# EAGLE board proyecto (EAGLE 9.6.2)
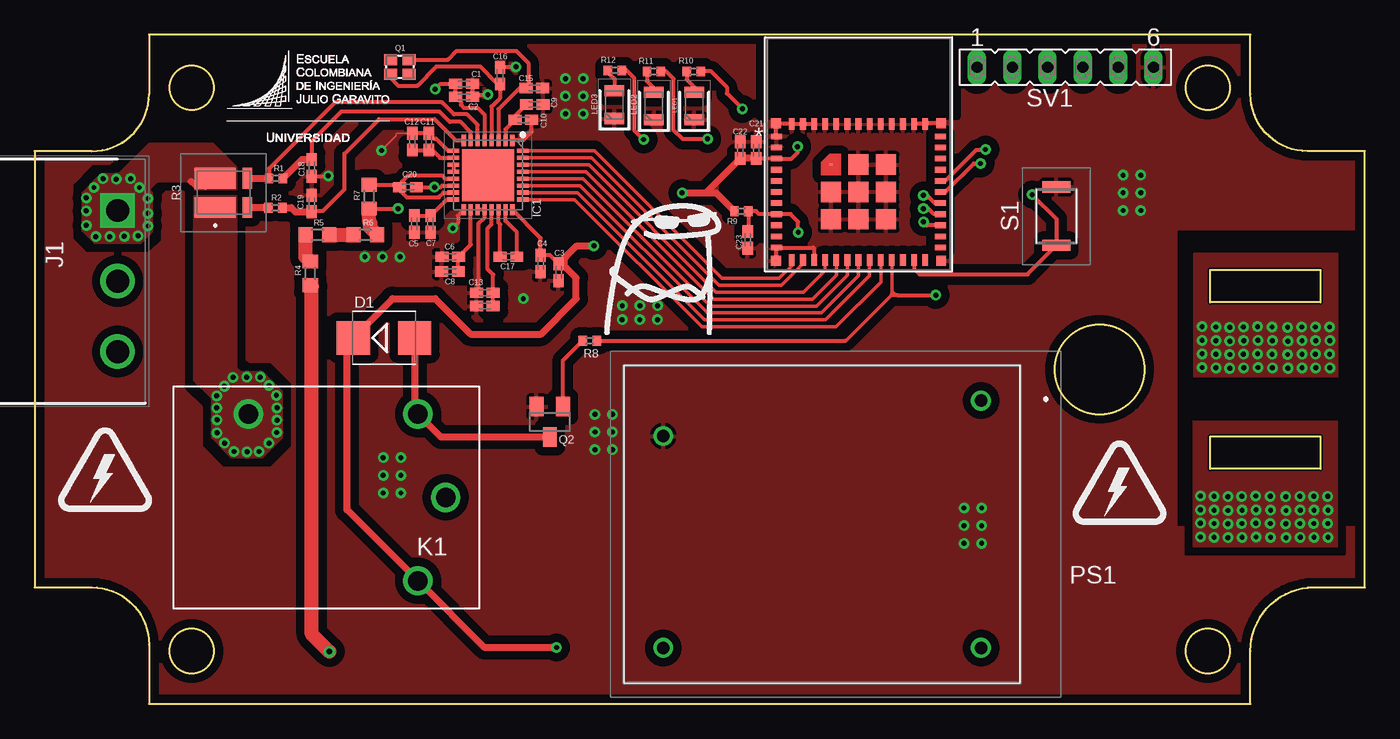
[diagram p0: board, top side]
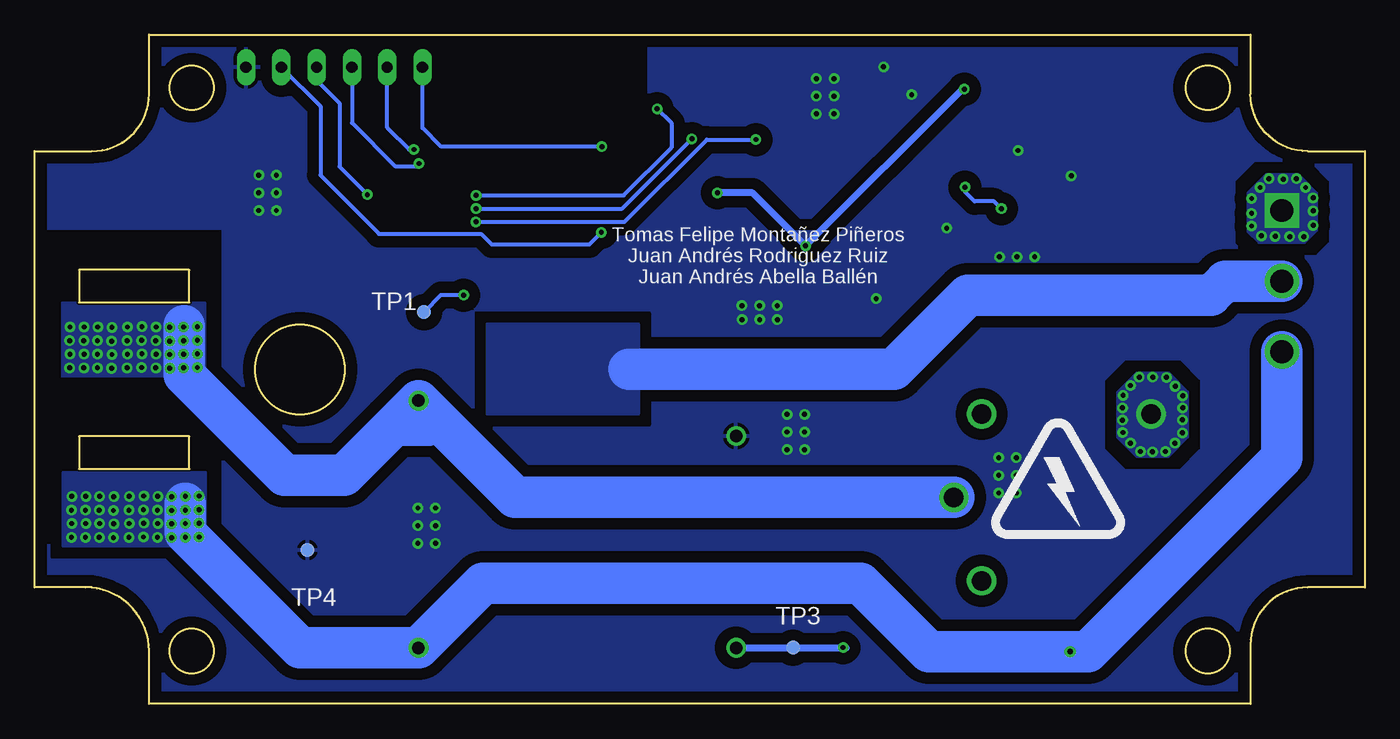
[diagram p1: board, bottom side, seen from below]

Size 95.76 x 48.16 mm. Coordinates in mm from the lower left corner, seen from the top.
Outline: 91.64,8.38 92.1,8.38
Outline: 92.1,8.38 95.76,8.38 95.76,39.78 91.64,39.78 arc-90 87.53,43.89 87.53,48.16 8.23,48.16 8.23,43.89 arc-90 4.11,39.78 0,39.78 0,8.38 4.11,8.38 arc-90 8.23,4.27 8.23,0 87.53,0 87.53,3.81 arc-90 92.1,8.38
Outline: 92.56,31.24 92.56,28.91 84.63,28.91 84.63,31.24 92.56,31.24
Outline: 84.63,16.92 84.63,19.25 92.56,19.25 92.56,16.92 84.63,16.92
Outline: circle at 11.3,44.35 radius 1.59
Outline: circle at 11.3,3.81 radius 1.59
Outline: circle at 84.45,3.81 radius 1.59
Outline: circle at 84.45,44.35 radius 1.59
Outline: circle at 76.66,24.08 radius 3.21
Copper layers (1*16): Top 0.035mm / dielectric 1.5mm / Bottom 0.035mm
Design rules "default *": minimum track width 4mil, minimum drill 0.35mm, track to track 0.1mm, track to pad 0.2mm, pad to pad 0.2mm, via to via 0.2mm, smd to smd 0mil, copper to edge 4mil, drill to drill 4mil, minimum pad ring 10mil, minimum via ring 8mil, stop-mask expansion 2mil, vias tented up to drill 20mil, thermal gap 10mil
tRestrict: area 52.5,42.4 to 66.1,48.1
bRestrict: area 52.5,42.4 to 66.1,48.1

## Footprints (pad centres in the part's own frame; a part is rotated, then mirrored left to right if it is on the bottom)
C0402K = smd 0.925 x 0.74: 1 -0.6,0; 2 0.6,0
SMB = smd 2.4 x 2.4: A 2.2,0; C -2.2,0
QFN50P500X500X80-33N = smd 0.8 x 0.3: 1 -2.5,1.75; 2 -2.5,1.25; 3 -2.5,0.75; 4 -2.5,0.25; 5 -2.5,-0.25; 6 -2.5,-0.75; 7 -2.5,-1.25; 8 -2.5,-1.75; 17 2.5,-1.75; 18 2.5,-1.25; 19 2.5,-0.75; 20 2.5,-0.25; 21 2.5,0.25; 22 2.5,0.75; 23 2.5,1.25; 24 2.5,1.75 | smd 0.3 x 0.8: 9 -1.75,-2.5; 10 -1.25,-2.5; 11 -0.75,-2.5; 12 -0.25,-2.5; 13 0.25,-2.5; 14 0.75,-2.5; 15 1.25,-2.5; 16 1.75,-2.5; 25 1.75,2.5; 26 1.25,2.5; 27 0.75,2.5; 28 0.25,2.5; 29 -0.25,2.5; 30 -0.75,2.5; 31 -1.25,2.5; 32 -1.75,2.5 | smd 3.75 x 3.75: 33 0,0
SHDRRA3W102P0X508_1X3_1706X120 = drill 1.65 pad 2.475 square: 1 0,0 | drill 1.65 pad 2.475: 2 -5.08,0; 3 -10.16,0
RELAY_PR28-3V-360-1A-E = drill 1.4: COIL1 -6.1,6; COIL2 -6.1,-6; COM -8.1,0; NO 6.1,-6
LEDC2012X120N = smd 0.8 x 1.4: 1 -1,0; 2 1,0
RAC0305SK = drill 0.9 pad 1.4: 1 0,0; 2 22.86,2.54; 3 22.86,17.78; 4 0,17.78
2.0X1.6_KX-5 = smd 0.95 x 0.8: 1 -0.675,-0.525; 2 0.675,-0.525; 3 0.675,0.525; 4 -0.675,0.525
SOT23 = smd 1 x 1.4: 1 -0.95,-1.1; 2 0.95,-1.1; 3 0,1.1
R0402 = smd 0.6 x 0.7: 1 -0.5,0; 2 0.5,0
WSK12161L000FEB = smd 1.495 x 2.95: 1 -1.053,0.6; 4 1.053,0.6 | smd 1.5 x 0.7: 2 -1.053,-1.725; 3 1.053,-1.725
R0603 = smd 1 x 1.1: 1 -0.85,0; 2 0.85,0
SKRKAEE020 = smd 0.8 x 2: 1 -2.1,0; 2 2.1,0
FE06 = drill 0.813 long: 1 -6.35,0; 2 -3.81,0; 3 -1.27,0; 4 1.27,0; 5 3.81,0; 6 6.35,0
TP10R = smd 1 x 1: TP 0,0
ESP32-PICO-MINI-02_EXP = smd 0.813 x 0.406: 1 -5.9,1.295; 2 -5.9,0.495; 3 -5.9,-0.305; 4 -5.9,-1.105; 5 -5.9,-1.905; 6 -5.9,-2.705; 7 -5.9,-3.505; 8 -5.9,-4.305; 9 -5.9,-5.105; 10 -5.9,-5.905; 11 -5.9,-6.705; 25 5.9,-6.705; 26 5.9,-5.905; 27 5.9,-5.105; 28 5.9,-4.305; 29 5.9,-3.505; 30 5.9,-2.705; 31 5.9,-1.905; 32 5.9,-1.105; 33 5.9,-0.305; 34 5.9,0.495; 35 5.9,1.295 | smd 0.406 x 0.813: 12 -4.8,-7.605; 13 -4,-7.605; 14 -3.2,-7.605; 15 -2.4,-7.605; 16 -1.6,-7.605; 17 -0.8,-7.605; 18 0,-7.605; 19 0.8,-7.605; 20 1.6,-7.605; 21 2.4,-7.605; 22 3.2,-7.605; 23 4,-7.605; 24 4.8,-7.605; 36 4.8,2.195; 37 4,2.195; 38 3.2,2.195; 39 2.4,2.195; 40 1.6,2.195; 41 0.8,2.195; 42 0,2.195; 43 -0.8,2.195; 44 -1.6,2.195; 45 -2.4,2.195; 46 -3.2,2.195; 47 -4,2.195; 48 -4.8,2.195 | smd 1.448 x 1.448: 49 0,-2.705; 55 0,-0.73; 56 1.975,-0.73; 57 1.975,-2.705; 58 1.975,-4.68; 59 0,-4.68; 60 -1.975,-4.68; 61 -1.975,-2.705 | smd 0.711 x 0.711: 50 5.95,2.245; 51 5.95,-7.655; 52 -5.95,-7.655; 53 -5.95,2.245 | smd 0.127 x 0.127: 54 -1.975,-0.73

## Placement (x,y rotation side)
C1  0.1u  [C0402K]  30.91,44.63 0 top
C2  4.7u  [C0402K]  30.91,43.69 0 top
C3  0.1u  [C0402K]  37.72,31.06 270 top
C4  4.7u  [C0402K]  36.42,31.7 270 top
C5  4.7u  [C0402K]  27.33,34.54 270 top
C6  4.7u  [C0402K]  29.92,32.18 0 top
C7  0.1u  [C0402K]  28.5,34.54 270 top
C8  0.1u  [C0402K]  29.9,31.12 0 top
C9  0.1u  [C0402K]  35.99,43.13 0 top
C10  4.7u  [C0402K]  35.18,42.04 0 top
C11  0.1u  [C0402K]  28.37,40.46 90 top
C12  4.7u  [C0402K]  27.18,40.46 90 top
C13  0.1u  [C0402K]  32.41,29.59 180 top
C14  4.7u  [C0402K]  32.41,28.63 180 top
C15  22p  [C0402K]  35.97,44.32 0 top
C16  22p  [C0402K]  33.5,45.21 270 top
C17  0.47u  [C0402K]  34.11,32.18 180 top
C18  0.1u  [C0402K]  19.94,38.58 270 top
C19  0.1u  [C0402K]  19.94,36.02 270 top
C20  0.15u  [C0402K]  26.87,37.19 0 top
C21  22u  [C0402K]  51.94,39.85 90 top
C22  0.1u  [C0402K]  50.8,39.85 90 top
C23  0.1u  [C0402K]  51.33,33.4 270 top
D1  [SMB]  25.15,26.34 0 top
IC1  ADE9153AACPZ  [QFN50P500X500X80-33N]  32.64,38.05 270 top
J1  796638-3  [SHDRRA3W102P0X508_1X3_1706X120]  5.97,35.51 90 top
K1  PR28-3V-360-1A-E  [RELAY_PR28-3V-360-1A-E]  21.49,14.86 180 top
LED1  NCD0805R1  [LEDC2012X120N]  47.47,43.03 90 top
LED2  NCD0805B2  [LEDC2012X120N]  44.58,43.03 90 top
LED3  NCD0805G1  [LEDC2012X120N]  41.73,43.13 90 top
PS1  RAC03-3.3SK  [RAC0305SK]  68.12,21.82 180 top
Q1  12.288M  [2.0X1.6_KX-5]  26.29,45.85 0 top
Q2  BSS123  [SOT23]  37.08,20.29 180 top
R1  150  [R0402]  17.37,37.82 0 top
R2  150  [R0402]  17.32,35.71 0 top
R3  WSK12161L000FEB  [WSK12161L000FEB]  13.59,36.78 90 top
R4  330k  [R0603]  19.84,30.99 90 top
R5  330k  [R0603]  20.35,33.76 0 top
R6  330k  [R0603]  23.8,33.76 0 top
R7  1k  [R0603]  24.08,36.5 90 top
R8  10K  [R0402]  39.95,26.14 180 top
R9  10K  [R0402]  50.88,35.46 0 top
R10  1k  [R0402]  47.45,45.52 180 top
R11  1k  [R0402]  44.58,45.52 180 top
R12  1k  [R0402]  41.76,45.59 180 top
S1  SKRKAEE020  [SKRKAEE020]  73.56,35.1 90 top
SV1  [FE06]  74.19,45.82 0 top
TP1  PTR1TP10R  [TP10R]  67.74,28.19 0 bottom
TP3  PTR1TP10R  [TP10R]  41.17,4.05 0 bottom
TP4  PTR1TP10R  [TP10R]  76.12,11.07 0 bottom
U1  ESP32-PICO-MINI-02-N8R2ESP32-PICO-MINI-02_EXP  [ESP32-PICO-MINI-02_EXP]  59.31,39.55 0 top

## Library data of the parts
C1-C23 = rcl; SPICEPREFIX: C
D1 = diode
IC1 = SamacSys_Parts; DESCRIPTION: Data Acquisition ADCs/DACs - Specialized 1 PH Mtr IC w/ Auto Calibration; HEIGHT: 0.8mm; MANUFACTURER_NAME: Analog Devices; MANUFACTURER_PART_NUMBER: ADE9153AACPZ; MOUSER_PART_NUMBER: 584-ADE9153AACPZ; MOUSER_PRICE-STOCK: https://www.mouser.co.uk/ProductDetail/Analog-Devices/ADE9153AACPZ?qs=rrS6PyfT74fO4%2FDiqnqz3A%3D%3D
J1 = SamacSys_Parts; DESCRIPTION: Body Features: Primary Product Color Green | Product Orientation Right Angle | Configuration Features: Stacking Configuration Side Stackable | Number of Positions 3 | Number of Rows 1 | Contact Features: Contact Base Material Phosphor Bronze | Contact Current Rating (Max) 15 AMP | Contact Mating Area Plating Material Tin | Dimensions: Wire Size .05 3 MMSQ | Wire Size 30 12 AWG | Electrical Characteristics: Operating Voltage 300 VAC | Housing Features: Housing Material PA 66 | Centerline (Pitch) .2 I; HEIGHT: 8.5mm; MANUFACTURER_NAME: TE Connectivity; MANUFACTURER_PART_NUMBER: 796638-3; MOUSER_PART_NUMBER: 571-7966383; MOUSER_PRICE-STOCK: https://www.mouser.co.uk/ProductDetail/TE-Connectivity/796638-3?qs=OgP1KchuM4OaLB9LUcSrBQ%3D%3D
K1 = PR28-3V-360-1A-E; AVAILABILITY: In Stock; CHECK_PRICES: https://www.snapeda.com/parts/PR28-3V-360-1A-E/Same+Sky/view-part/?ref=eda; CUI_PURCHASE_URL: https://www.cuidevices.com/product/relays/power-relays/pr28-3v-360-1a-e?utm_source=snapeda.com&utm_medium=referral&utm_campaign=snapedaBOM; DESCRIPTION: 22 x 16 x 16.6 mm, 3 V, 16 A, SPST (1 Form A), Epoxy Sealed, Class F, Power Relay; MF: CUI Devices; MP: PR28-3V-360-1A-E; PACKAGE: None; PRICE: None; PURCHASE-URL: https://www.snapeda.com/api/url_track_click_mouser/?unipart_id=15935205&manufacturer=CUI Devices&part_name=PR28-3V-360-1A-E&search_term=None; SNAPEDA_LINK: https://www.snapeda.com/parts/PR28-3V-360-1A-E/Same+Sky/view-part/?ref=snap
LED1 = SamacSys_Parts; DESCRIPTION: LED Chip Light Emitting Diode; HEIGHT: 1.2mm; MANUFACTURER_NAME: Foshan NationStar Optoelectronics; MANUFACTURER_PART_NUMBER: NCD0805R1
LED2 LED3 = libreria_propia
PS1 = SamacSys_Parts; DESCRIPTION: AC/DC Power Modules 3W 85-264Vin 3.3Vout 900mA; HEIGHT: 18.4mm; MANUFACTURER_NAME: RECOM Power; MANUFACTURER_PART_NUMBER: RAC03-3.3SK; MOUSER_PART_NUMBER: 919-RAC03-3.3SK; MOUSER_PRICE-STOCK: https://www.mouser.co.uk/ProductDetail/RECOM-Power/RAC03-3.3SK?qs=EBDBlbfErPyS11fagCV%252BCw%3D%3D
Q1 = crystal-geyer_V1_0
Q2 = transistor-small-signal
R1 R2 R4-R12 = rcl; SPICEPREFIX: R
R3 = SamacSys_Parts; DESCRIPTION: Current Sense Resistors - SMD .001 OHM 1% 3W 50PPM; HEIGHT: 1.9mm; MANUFACTURER_NAME: Vishay; MANUFACTURER_PART_NUMBER: WSK12161L000FEB; MOUSER_PART_NUMBER: 71-WSK12161L000FEB; MOUSER_PRICE-STOCK: https://www.mouser.co.uk/ProductDetail/Vishay-Dale/WSK12161L000FEB?qs=jj7GbYRQuOZg3vJxu0nEzw%3D%3D
S1 = SamacSys_Parts; DESCRIPTION: Tactile Switches 3.9x2.9x2.0mm 160gf Packaging Temp 80oC; HEIGHT: 2mm; MANUFACTURER_NAME: ALPS Electric; MANUFACTURER_PART_NUMBER: SKRKAEE020; MOUSER_PART_NUMBER: 688-SKRKAEE020; MOUSER_PRICE-STOCK: https://www.mouser.co.uk/ProductDetail/Alps-Alpine/SKRKAEE020?qs=MrosSN5%252BUQW89XjXIp8Ugw%3D%3D
SV1 = con-lsta; OC_FARNELL: unknown; OC_NEWARK: unknown
TP1 TP3 TP4 = testpad
U1 = 2024-09-07_16-09-34_Library; COPYRIGHT: Copyright (C) 2024 Ultra Librarian. All rights reserved.; MANUFACTURER_PART_NUMBER: ESP32-PICO-MINI-02-N8R2; MFR_NAME: Espressif Systems

## Nets
+3V3: C1.1 C2.1 C3.1 C4.1 C21.1 C22.1 D1.C IC1.5 IC1.24 K1.COIL1 PS1.3 R9.1 SV1.1 TP3.TP U1.3
AVDDOUT: C5.1 C7.1 IC1.16
BOOT: S1.1 SV1.4 U1.23
CARGA-M: K1.NO R3.1
CF1: IC1.26 U1.19
CF2: IC1.25 U1.20
CLKIN: C16.2 IC1.4 Q1.1
CLKOUT: C15.1 IC1.3 Q1.3
DVDDOUT: C9.1 C10.1 IC1.2
EN: C23.1 R9.2 SV1.5 U1.8
GND: C1.2 C2.2 C3.2 C4.2 C5.2 C6.1 C7.2 C8.1 C9.2 C10.2 C11.2 C12.2 C13.2 C14.2 C15.2 C16.1 C18.2 C19.1 C21.2 C22.2 C23.2 IC1.1 IC1.9 IC1.17 IC1.19 IC1.20 LED1.1 LED2.1 LED3.1 PS1.2 Q2.2 S1.2 SV1.6 TP4.TP U1.1 U1.2 U1.11 U1.14 U1.36 U1.37 U1.38 U1.39 U1.40 U1.41 U1.42 U1.43 U1.44 U1.45 U1.46 U1.47 U1.48 U1.49 U1.50 U1.51 U1.52 U1.53 U1.54 U1.55 U1.56 U1.57 U1.58 U1.59 U1.60 U1.61
IRQ: IC1.27 U1.18
LED_B: R11.1 U1.28
LED_G: R12.1 U1.27
LED_R: R10.1 U1.29
LINEA: K1.COM PS1.1
M: J1.1 R3.4
MSH: C13.1 C14.1 IC1.21
N$1: C17.1 IC1.23
N$2: IC1.6 R1.1 R3.3
N$3: C18.1 IC1.7 R1.2
N$4: C17.2 IC1.22
N$5: C19.2 IC1.8 R2.2
N$6: R2.1 R3.2
N$7: R4.2 R5.1
N$8: R5.2 R6.1
N$9: C20.2 IC1.14 R6.2 R7.1
N$10: C20.1 IC1.13 IC1.15 R7.2
N$11: LED1.2 R10.2
N$12: LED2.2 R11.2
N$13: Q2.1 R8.2
N$14: LED3.2 R12.2
N$16: IC1.11 IC1.12
NEUTRO: J1.3 PS1.4 R4.1
PROG_RX: SV1.3 U1.30
PROG_TX: SV1.2 U1.31
REFIN: C6.2 C8.2 IC1.18
RELAY: D1.A K1.COIL2 Q2.3
RELAY_CONTROL: R8.1 TP1.TP U1.21
RESET: IC1.28 U1.17
RX: IC1.29 U1.16
SCLK: IC1.31 U1.13
SS: IC1.32 U1.12
TIERRA: J1.2
TX: IC1.30 U1.15
VDDOUT2P5: C11.1 C12.1 IC1.10

## Tracks (layer width: path | path; a pad name or v marks a point on that pad's centre or on a via)
+3V3  (via drill 0.35)
  Top 0.3: C3.1 37.08,32.3 C4.1 36.42,33.51 IC1.24 | C21.1 53.39,39.25 U1.3 54.48,39.24 54.91,39.68 v54.91,40.11 | IC1.5 32.39,42.39 31.88,42.9 30.89,42.9 30.68,43.1 30.68,43.32 C2.1 C1.1 29.21,44.63 v28.83,44.25 | 38.36,31.3 38.26,31.4 38.26,32.2
  Top 0.5: v40.26,32.97 39.02,32.97 38.26,32.2 C3.1 37.99,31.66 38.36,31.3 38.99,30.66 38.99,29.16 36.45,26.62 31.37,26.62 28.83,29.16 25.76,29.16 D1.C 22.48,25.87 22.48,13.97 K1.COIL1 32.39,4.05 v37.56,4.05 | 48.33,36.78 49.05,36.78 R9.1 | v46.61,36.78 48.33,36.78 | 48.33,36.78 48.93,37.38 C22.1 C21.1
  Bottom 0.3: v28.83,44.25 28.98,44.25 | v54.91,40.11 66.5,40.11 67.84,41.45 SV1.1 | TP3.TP 41.15,4.04 37.34,4.04
  Bottom 0.5: PS1.3 37.55,4.04 | v37.56,4.05 37.55,4.04 | 37.34,4.04 37.55,4.04 | v46.61,36.78 44.07,36.78 v40.26,32.97 28.98,44.25
  pour Bottom: 39.26,34.04 41.17,34.04 41.24,33.98 40.36,33.1 40.21,33.1
  pour Top: 49.18,36.78 49.18,37.44 48.75,37.01 48.75,36.77 49.17,36.77
AVDDOUT
  Top 0.3: C5.1 C7.1 29.65,36.3 IC1.16
BOOT  (via drill 0.35)
  Top 0.3: U1.23 63.31,31.33 63.73,30.91 71.47,30.91 S1.1 73.56,34.9 v71.81,36.65
  Bottom 0.3: SV1.4 75.46,44.88 73.81,43.23 73.81,38.66 v71.81,36.65
CARGA-M  (via drill 0.35)
  other vias: 13.11,21.31 13.64,22.86 14.27,23.5 15.27,23.52 16.23,23.52 16.87,22.91 13.13,20.45 13.11,22.17 13.13,19.51 13.67,18.77 14.35,18.16 15.29,18.14 17.4,22.2 16.15,18.16 17.45,21.31 17.45,20.42 17.42,19.53 16.87,18.77
  pour Top (rank 2, no thermals): 12.73,22.02 12.73,19.18 14.15,17.75 16.41,17.75 17.81,19.15 17.81,22.45 16.41,23.85 14.83,23.85 14.55,24.13 14.55,36.53 11.46,36.53 11.46,23.29
  pour Bottom (no thermals): 12.73,22.48 12.73,19.18 14.15,17.75 16.41,17.75 17.81,19.15 17.81,22.45 16.41,23.85 14.1,23.85
CF1
  Top 0.25: IC1.26 39.07,36.8 48.23,27.63 56.92,27.63 60.11,30.82 U1.19
CF2
  Top 0.25: IC1.25 38.86,36.3 48.03,27.13 57.69,27.13 60.91,30.35 U1.20
CLKIN
  Top 0.3: IC1.4 32.89,42.98 33.5,43.6 C16.2 33.32,44.61 32.06,45.87 28.93,45.87 27.56,44.5 26.16,44.5 25.61,45.05 Q1.1
CLKOUT
  Top 0.3: IC1.3 33.39,42.8 34.91,44.32 C15.1 35.54,44.5 35.54,46.12 34.67,46.99 30.38,46.99 29.76,46.37 Q1.3
DVDDOUT
  Top 0.3: C9.1 34.58,42.32 C10.1 33.89,41.35 IC1.2
EN  (via drill 0.35)
  Top 0.3: v54.97,33.93 54.97,34.7 54.42,35.24 U1.8 52.16,35.24 51.94,35.46 R9.2 51.38,34.04 C23.1
  Bottom 0.3: SV1.5 75.18,43 75.18,38.05 70.97,33.83 63.63,33.83 62.86,33.07 55.83,33.07 v54.97,33.93
GND  (via drill 0.35)
  Top 0.102: v24.97,39.83 26.03,40.89 26.03,41.02 26.08,41.06 C12.2
  Top 0.3: C18.2 21.12,37.98 v21.13,38 | U1.52 53.41,31.94 U1.11 56.03,32.84 56.11,32.77 U1.14 | C12.2 C11.2 28.76,40.68 28.89,40.68 29.76,39.8 IC1.9 | IC1.17 30.48,35.14 30.48,34.62 v30.1,34.24 | C13.2 31.94,29.72 31.94,34.55 32.39,35 IC1.20 IC1.19 | U1.1 53.36,40.89 U1.53 54.46,41.79 U1.48 U1.47 U1.46 | IC1.1 34.43,40.59 35.18,40.59 35.78,41.19 C10.2 | C16.1 33.54,45.85 v34.65,45.85 | C1.2 31.51,44.16 C2.2 31.67,43.85 31.83,43.85 v32.62,43.85 | U1.50 64.16,41.79 U1.36 U1.37
  other vias: 35.18,29.16 40.33,20.84 41.6,20.84 40.33,19.57 41.6,19.57 40.33,18.3 41.6,18.3 78.36,38.05 79.63,38.05 78.36,36.78 79.63,36.78 78.36,35.51 79.63,35.51 66.9,14.1 68.17,14.1 66.9,12.83 68.17,12.83 66.9,11.56 68.17,11.56 38.21,45 39.48,45 38.21,43.73 39.48,43.73 38.21,42.46 39.48,42.46 42.3,28.66 42.29,27.65 43.57,28.66 43.56,27.65 44.84,28.66 44.83,27.65 23.77,32.18 25.04,32.18 26.31,32.18 25.09,17.72 26.36,17.72 25.09,16.45 26.36,16.45 25.09,15.18 26.36,15.18
  pour Bottom (isolate 0.813, rank 4): -4.19,50.75 -4.19,-2.59 96.14,-2.59 96.14,11.38 82.17,11.38 82.17,34.24 96.14,34.24 96.14,50.75
  pour Top (isolate 0.61, rank 4): -4.19,39.32 -4.19,-1.32 97.41,-1.32 97.41,12.65 82.17,12.65 82.17,34.24 96.14,34.24 96.14,49.48 -4.19,49.48
  pour Top (no thermals): 44.07,41.86 44.07,42.27 45.16,42.27 45.16,41.76 45.16,41.3 45.19,41.27 45.19,41.05 45.19,40.89 44.88,40.89 44.83,40.94 44.83,41.15 44.73,41.25 44.3,41.68 44.25,41.68 44.07,41.68
  pour Top (no thermals): 66.14,31.75 66.12,31.78 65.58,31.78 65.56,31.75 65.56,31.6 64.97,31.6 64.97,32.18 65.56,32.18 65.56,32 65.56,31.98 66.17,31.98 66.17,31.78
  pour Top (no thermals): 53.13,41.94 52.83,41.94 52.49,41.6 52.49,41.34 52.69,41.13 52.69,41.32 53.03,41.66 53.11,41.66 53.11,41.93
  pour Top (no thermals): 65.57,41.97 66.46,41.97 66.61,41.82 66.61,41.76 66.24,41.38 66.1,41.38 65.79,41.69 65.56,41.69 65.56,41.97
IRQ
  Top 0.25: IC1.27 39.27,37.3 48.44,28.13 56.63,28.13 59.31,30.81 U1.18
LED_B  (via drill 0.35)
  Top 0.3: U1.28 64.74,35.24 64.34,35.65 v63.98,35.65 | v48.44,40.67 48.41,40.64 46.66,40.64 46,41.3 46,44.98 45.47,45.52 R11.1
  Bottom 0.3: v63.98,35.65 53.46,35.65 v48.44,40.67
LED_G  (via drill 0.35)
  Top 0.3: U1.27 64.23,34.44 v63.99,34.69 | v43.84,40.61 43.81,40.61 43.18,41.25 43.18,45.01 42.6,45.59 R12.1
  Bottom 0.3: v63.99,34.69 53.3,34.69 47.37,40.61 v43.84,40.61
LED_R  (via drill 0.35)
  Top 0.3: v63.98,36.6 64.24,36.6 64.8,36.04 U1.29 | v50.94,42.82 49.83,43.94 49.83,44.38 48.69,45.52 R10.1
  Bottom 0.3: v63.98,36.6 53.36,36.6 49.93,40.04 49.93,41.81 v50.94,42.82
LINEA  (via drill 0.35)
  Bottom 1: 69.94,20.01 69.5,19.58 69.5,19.1 67.2,19.1 67.2,19.62 67.46,19.88 68.12,19.88
  Bottom 3: K1.COM 61.16,14.86 65.73,19.43 PS1.1 69.94,20.01 | 69.94,20.01 73.48,16.46 77.78,16.46 85.01,23.7 85.01,27.2 | 69.94,20.01
  other vias: 84.05,27.15 93.22,27.13 84.05,26.16 85.04,26.14 86.03,26.11 87.05,26.14 88.06,26.16 89.1,26.14 90.22,26.11 91.24,26.14 92.23,26.14 93.24,26.14 85.04,27.13 86.03,27.1 87.02,27.13 88.04,27.15 89.08,27.13 90.2,27.1 91.21,27.13 92.2,27.13 84.05,25.2 93.22,25.17 84.05,24.21 85.04,24.18 86.03,24.16 87.05,24.18 88.06,24.21 89.1,24.18 90.22,24.16 91.24,24.18 92.23,24.18 93.24,24.18 85.04,25.17 86.03,25.15 87.02,25.17 88.04,25.2 89.08,25.17 90.2,25.15 92.2,25.17 91.24,25.17
  pour Top (no thermals): 83.46,32.38 83.46,23.57 93.83,23.57 93.83,32.38
  pour Bottom: 83.46,28.85 93.83,28.85 93.83,23.57 83.46,23.57
M  (via drill 0.35)
  Top 0.3: R3.4 12.29,37.14 11.61,37.14 11.15,37.59 11.27,37.71 11.43,37.54 12.7,37.54 R3.4
  other vias: 4.39,33.63 5.41,33.63 6.45,33.66 7.44,33.68 8.15,36.37 8.15,35.31 8.15,34.39 3.71,34.44 3.71,35.48 3.71,36.42 4.27,37.16 4.93,37.8 5.87,37.77 6.91,37.8 7.54,37.16
  pour Top (no thermals): 11.51,37.03 14.53,37.03 14.53,38.63 12.85,40.31 8.23,40.31 6.02,38.1 4.75,38.1 3.4,36.75 3.4,34.09 4.32,33.17 7.65,33.17 8.46,33.99 8.46,36.78 8.23,37.01 8.84,37.62 11.51,37.62
  pour Bottom (no thermals): 4.75,38.1 7.14,38.1 8.46,36.78 8.46,33.99 7.65,33.17 4.32,33.17 3.4,34.09 3.4,36.75
MSH
  Top 0.3: C14.1 C13.1 33.01,30.9 32.61,31.29 32.61,34.24 32.89,34.51 IC1.21
N$1
  Top 0.3: C17.1 34.71,33.94 33.89,34.77 IC1.23
N$2
  Top 0.3: IC1.6 31.89,41.67 31.14,42.42 30.17,42.42 29.31,43.28 21.61,43.28 16.86,38.53 16.86,37.83
  Top 0.5: R3.3 16.86,37.83 R1.1
N$3
  Top 0.3: IC1.7 31.39,41.15 30.66,41.88 29.87,41.88 29.13,42.62 22.07,42.62 19.94,40.49 C18.1
  Top 0.5: R1.2 19.24,39.18 C18.1
N$4
  Top 0.3: C17.2 33.51,34.51 33.39,34.63 IC1.22
N$5
  Top 0.3: C19.2 20.01,35.48 20.75,35.48 22.3,37.03 22.3,39.6 24.79,42.09 28.78,42.09 30.32,40.55 IC1.8
  Top 0.5: R2.2 18.47,35.71 18.76,35.42 C19.2
N$6
  Top 0.5: R3.2 16.81,35.73 R2.1
N$7
  Top 1: R4.2 19.49,32.18 R5.1
N$8
  Top 1: R5.2 R6.1
N$9  (via drill 0.35)
  Top 0.3: C20.2 v28.78,37.19 29.23,37.19 29.35,37.3 IC1.14 | R7.1 26.15,35.65 v26.16,35.64
  Top 1: R6.2 24.15,34.26 24.15,34.6 24.08,34.67 R7.1
  Bottom 0.3: v26.16,35.64 26.69,36.17 28.09,36.17 28.78,36.85 v28.78,37.19
N$10
  Top 0.3: C20.1 26.44,37.35 26.44,37.59 26.85,38 29.35,38 29.55,37.8 IC1.13 | C20.1 26.27,36.96 26.78,36.45 29.08,36.45 29.43,36.8 IC1.15 | R7.2 26.11,37.35 C20.1
N$11
  Top 0.3: R10.2 46.95,44.93 47.47,44.41 LED1.2
N$12
  Top 0.3: R11.2 44.08,44.81 44.58,44.31 LED2.2
N$13
  Top 0.3: Q2.1 38.03,24.72 R8.2
N$14
  Top 0.3: R12.2 41.26,45.44 41.47,45.23 41.47,45.24 41.73,44.97 LED3.2
N$16
  Top 0.3: IC1.11 IC1.12
NEUTRO  (via drill 0.35, 0.4)
  Top 1: R4.1 19.94,30.04 19.94,5.03 v21.21,3.76
  Bottom 3: J1.3 5.97,17.73 19.94,3.76 v21.21,3.76 31.37,3.76 36.3,8.69 63.47,8.69 PS1.4 76.65,4.04 84.94,12.33 84.94,14.45
  other vias: 83.92,14.96 93.09,14.94 83.92,13.97 84.91,13.94 85.9,13.92 86.92,13.94 87.93,13.97 88.98,13.94 90.09,13.92 91.11,13.94 92.1,13.94 93.12,13.94 84.91,14.94 85.9,14.91 86.89,14.94 87.91,14.96 88.95,14.94 90.07,14.91 91.08,14.94 92.07,14.94 83.92,13 93.09,12.98 83.92,12.01 84.91,11.99 85.9,11.96 86.92,11.99 87.93,12.01 88.98,11.99 90.09,11.96 91.11,11.99 92.1,11.99 93.12,11.99 84.91,12.98 85.9,12.95 86.89,12.98 87.91,13 88.95,12.98 90.07,12.95 91.08,12.98 92.07,12.98
  pour Top (no thermals): 83.41,20.32 83.41,11.35 93.78,11.35 93.78,20.32
  pour Bottom: 83.41,16.66 93.78,16.66 93.78,11.35 83.41,11.35
PROG_RX  (via drill 0.35)
  Top 0.3: U1.30 65.57,36.84 67.61,38.89 v68.1,38.89
  Bottom 0.3: SV1.3 72.92,41.81 69.83,38.71 68.28,38.71 v68.1,38.89
PROG_TX  (via drill 0.35)
  Top 0.3: U1.31 65.56,37.64 67.77,39.85 68.4,39.85 v68.45,39.9
  Bottom 0.3: v68.45,39.9 68.81,39.9 70.38,41.48 SV1.2
REFIN
  Top 0.3: C8.2 30.5,32.16 C6.2 31.39,33.05 IC1.18
RELAY
  Top 0.5: Q2.3 29.25,19.19 K1.COIL2 27.35,21.1 D1.A
RELAY_CONTROL  (via drill 0.35)
  Top 0.102: 62.08,29.41 61.9,29.59 | 61.9,29.59 61.71,29.78 61.71,29.79 | 61.71,29.59 61.9,29.59
  Top 0.25: U1.21 61.71,29.79 61.71,29.59 61.71,29.45 58.39,26.14
  Top 0.3: R8.1 58.39,26.14 | 61.71,29.45 61.75,29.41 62.08,29.41 v64.87,29.41
  Bottom 0.3: v64.87,29.41 66.52,29.41 TP1.TP
RESET
  Top 0.25: IC1.28 39.48,37.8 48.65,28.63 56.29,28.63 58.51,30.85 U1.17
RX
  Top 0.25: IC1.29 39.69,38.3 48.85,29.13 55.98,29.13 57.71,30.86 U1.16
SCLK
  Top 0.25: IC1.31 40.1,39.3 49.27,30.13 53.77,30.13 55.31,31.67 U1.13
SS
  Top 0.25: IC1.32 40.31,39.8 49.48,30.63 53.59,30.63 54.51,31.55 U1.12
TIERRA
  Bottom 3: J1.2 10.06,30.43 11.07,29.41 28.57,29.41 33.91,24.08 52.96,24.08
  pour Bottom: 63.12,20.88 63.12,27.33 52.32,27.33 52.32,20.88
TX
  Top 0.25: IC1.30 39.89,38.8 49.06,29.63 55.36,29.63 56.91,31.18 U1.15
VDDOUT2P5
  Top 0.3: C12.1 C11.1 28.49,39.98 29.17,39.3 IC1.10

## Text on the board
bNames: Tomas Felipe Montañez Piñeros / Juan Andrés Rodriguez Ruiz / Juan Andrés Abella Ballén